# Altium PCB PCB1.PcbDoc
Units mm, origin at the board's own origin, x right, y up, seen from the top; angles counter-clockwise.
Board outline 59.82 x 77.34 mm, 2 copper layers (Top Layer, Bottom Layer); 23 components, 20 nets, 69 pads, 4 vias.
Unrouted connection lines stored in the file: 3.
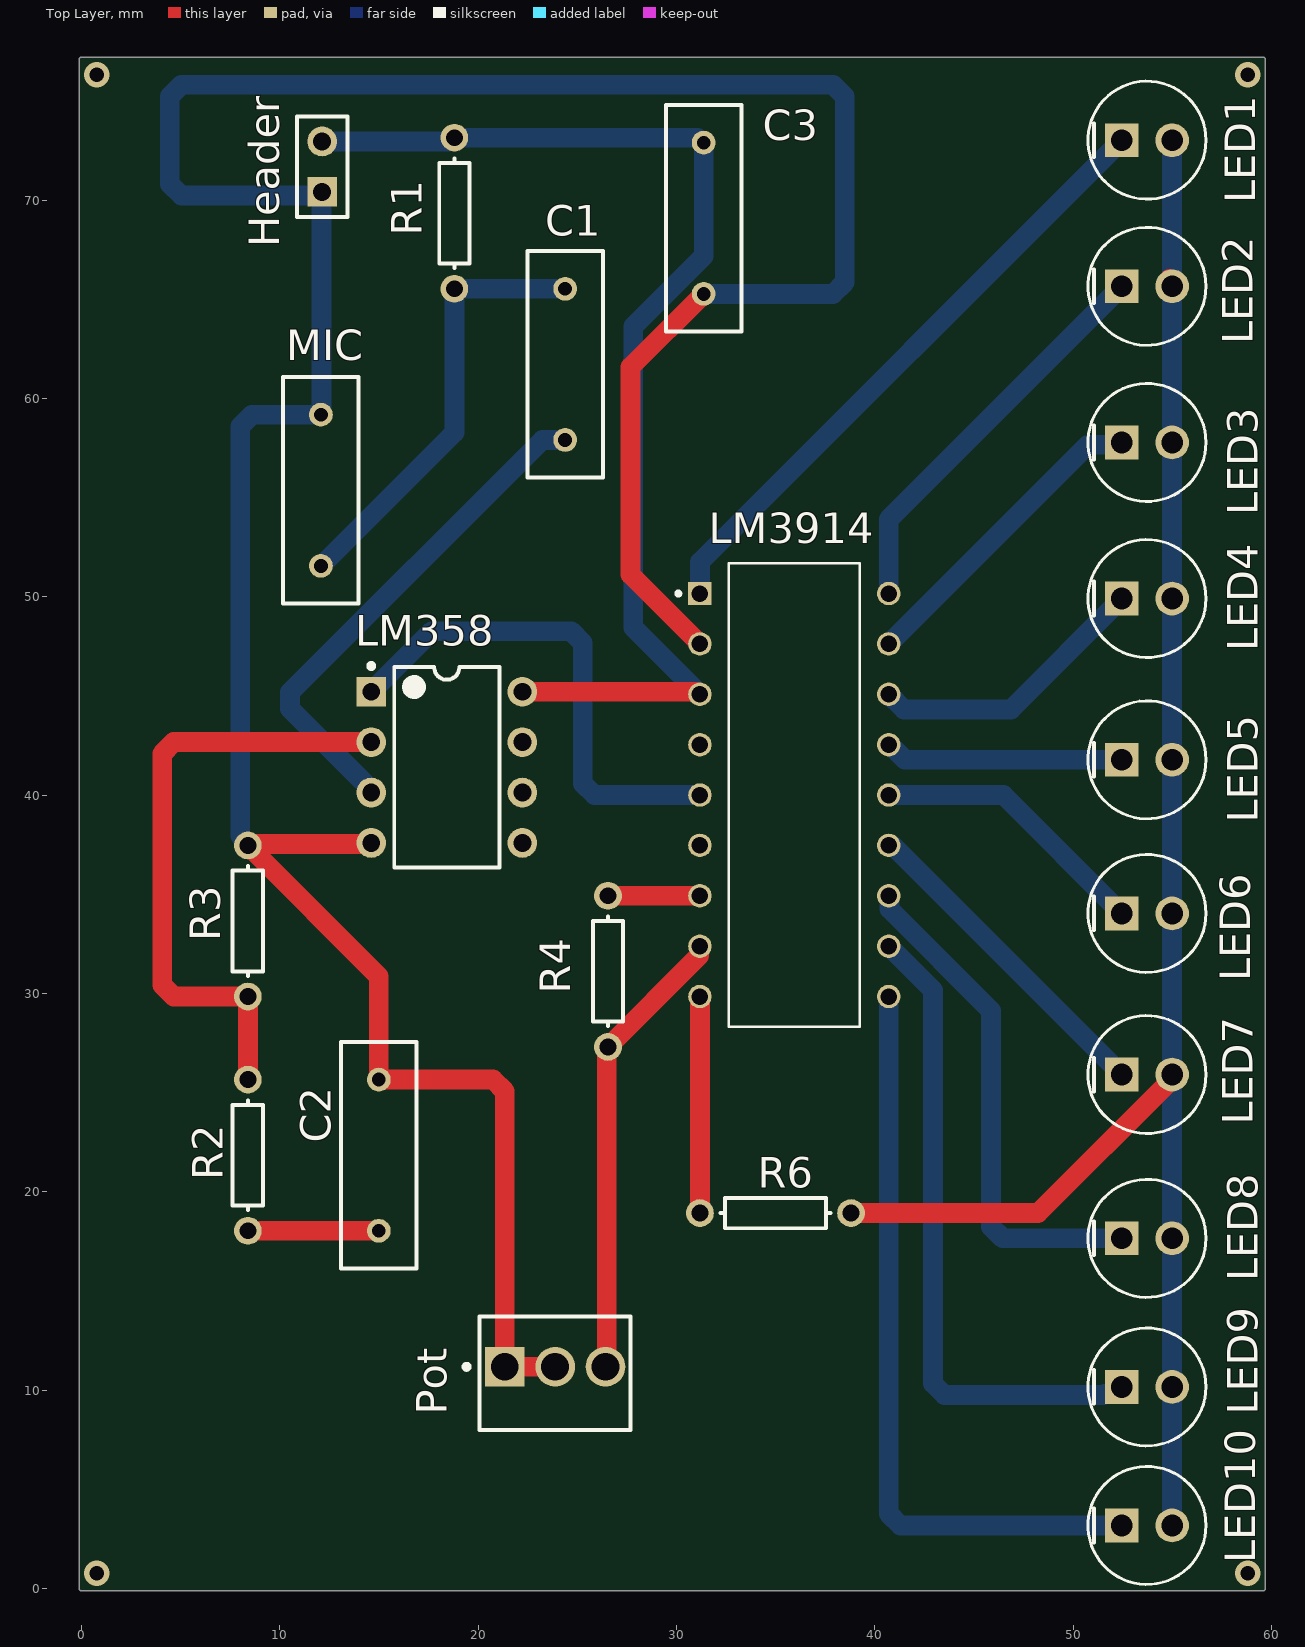
[diagram p0: Top Layer view]
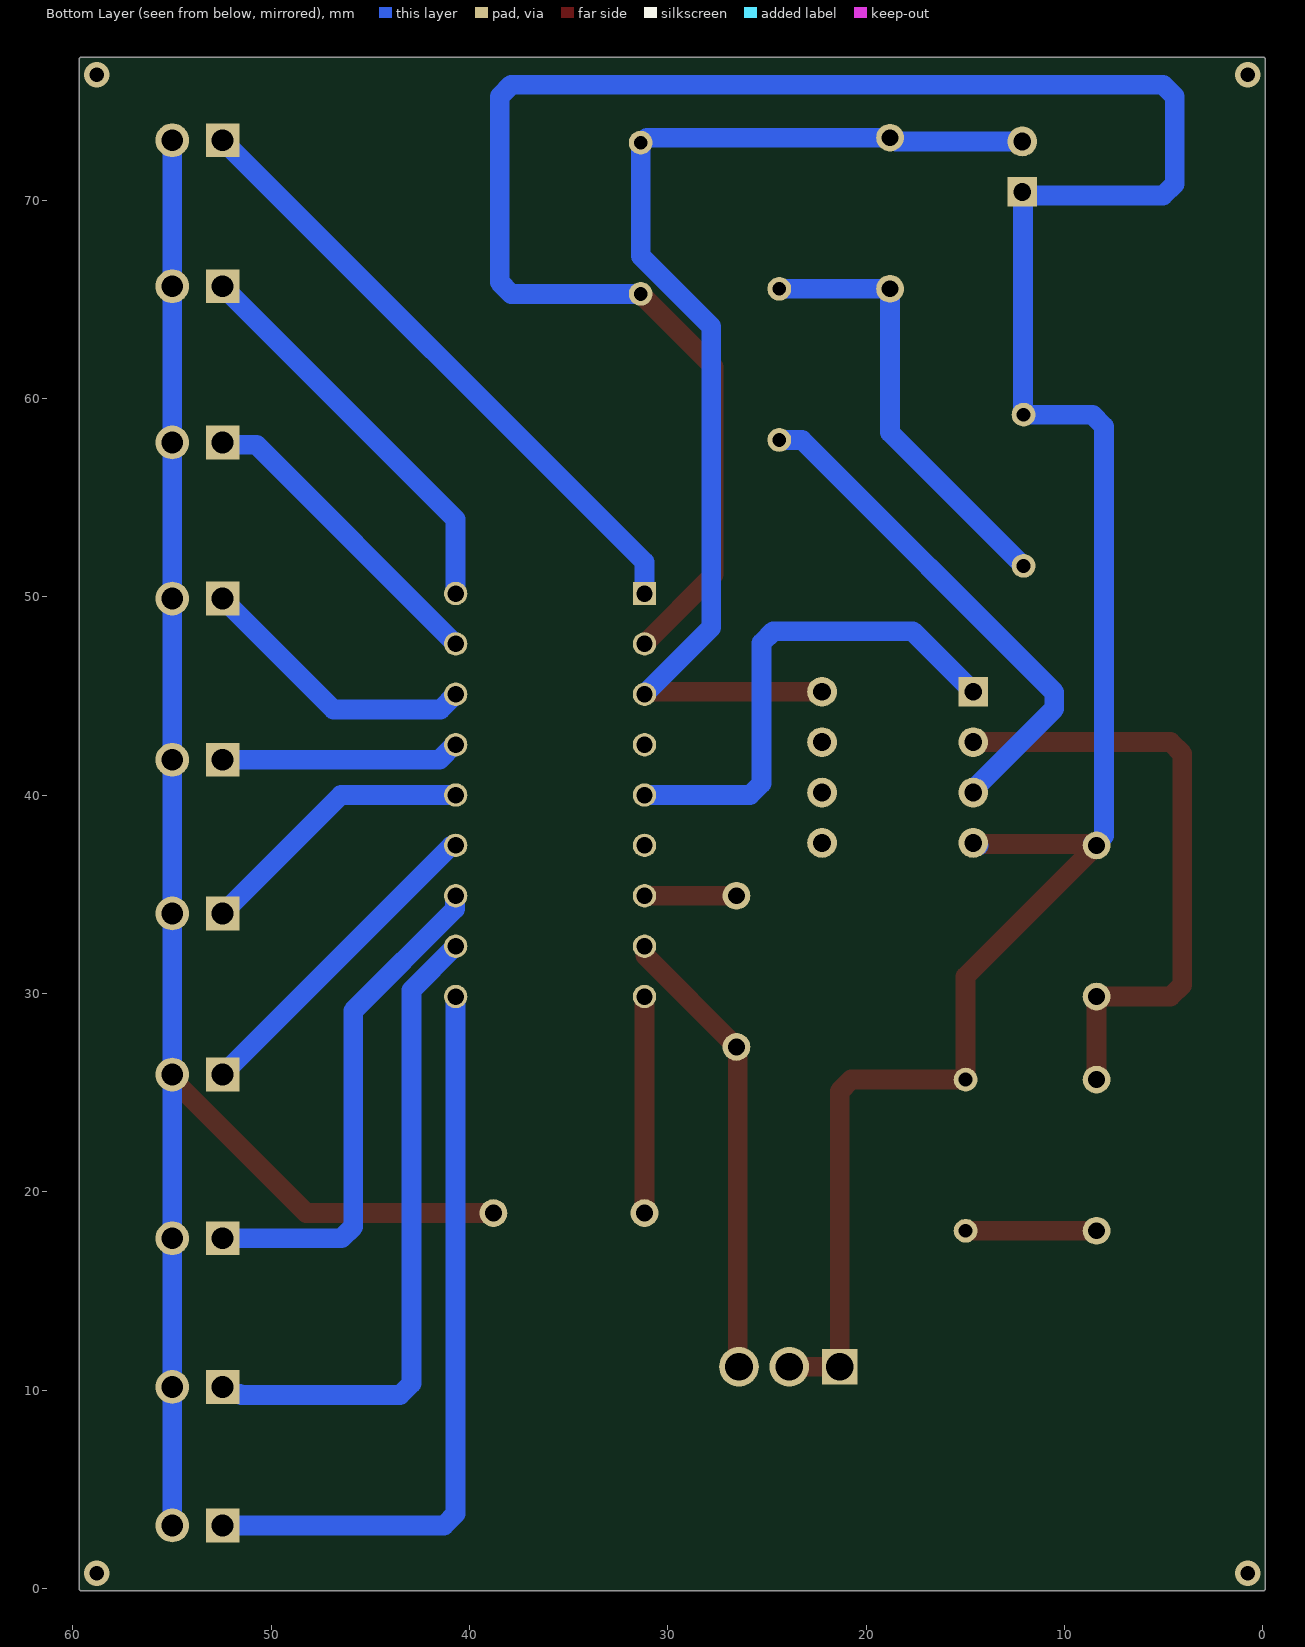
[diagram p1: Bottom Layer view, seen from below]

## Layer stack, top to bottom
Top Solder: solder mask 0.0102, Solder Resist, Dk 3.5
Top Layer: signal copper 0.0356
Dielectric 1: dielectric 0.32, FR-4, Dk 4.8
Bottom Layer: signal copper 0.0356
Bottom Solder: solder mask 0.0102, Solder Resist, Dk 3.5

## Board outline
-0.127,0 ccw(c0,0) 0,-0.127 59.563,-0.127 ccw(c59.563,0) 59.69,0 59.69,77.089 ccw(c59.563,77.089) 59.563,77.216 0,77.216 ccw(c0,77.089) -0.127,77.089

## Design rules (kind name [scope] priority, off if disabled: settings)
Clearance [All] p1: gap=0.254 ignorepadtopadclearanceinfootprint=FALSE except(0: Arc-Hole Track-Hole SMDPad-Hole THPad-Hole Via-Hole Fill-Hole Poly-Hole Region-Hole Text-Hole)
PolygonConnect [All] p1: connectstyle=Relief reliefconductorwidth=0.254 reliefentries=4 polygonreliefangle="90 Angle" airgapwidth=0.254
RoutingVias [All] p1: holewidth=0.711 width=1.27 viastyle="Through Hole" minholewidth=0.711 minwidth=1.27 maxholewidth=0.711 maxwidth=1.27
SolderMaskExpansion [All] p1: expansion=0.102 istentingtop=FALSE
Width [All] p1: maxlimit=1 minlimit=0.8 preferedwidth=1 minimp=50.000000 maximp=50.000000 favimp=50.000000
30 further rules are at their usual default settings.

## Components (designator, comment, footprint, x,y, rotation, side; value= is the part's Value field where it differs from the comment)
C1 "Cap" RAD-0.3 24.384,61.722 r90 top value=100nf
C2 "Cap" RAD-0.3 14.986,21.844 r90 top value=100nf
C3 "Cap" RAD-0.3 31.369,69.088 r90 top value=100nf
Header "Guç Kaynagı" HDR1X2 12.128,70.421 r90 top (schematic designator HHHH)
LED1 "" FP-6_544-5259_08-4-MFG 53.721,73.025 r0 top
LED2 "" FP-6_544-5259_08-4-MFG 53.721,65.659 r0 top
LED3 "" FP-6_544-5259_08-4-MFG 53.721,57.785 r0 top
LED4 "" FP-6_544-5259_08-4-MFG 53.721,49.911 r0 top
LED5 "" FP-6_544-5259_08-4-MFG 53.721,41.783 r0 top
LED6 "" FP-6_544-5259_08-4-MFG 53.721,34.036 r0 top
LED7 "" FP-6_544-5259_08-4-MFG 53.721,25.908 r0 top
LED8 "" FP-6_544-5259_08-4-MFG 53.721,17.653 r0 top
LED9 "" FP-6_544-5259_08-4-MFG 53.721,10.16 r0 top
LED10 "" FP-6_544-5259_08-4-MFG 53.721,3.175 r0 top
LM358 "" ONSC-PDIP-8-626-05_M 18.415,41.402 r0 top
LM3914 "" DIP952W45P254L2336H533Q18 35.941,40.005 r0 top
MIC "Cap" RAD-0.3 12.065,55.372 r90 top value=1UF
Pot "" TECO-640456-3 23.876,11.176 r180 top (schematic designator Pott)
R1 "Res1" AXIAL-0.3 18.796,69.342 r90 top value=10k
R2 "Res1" AXIAL-0.3 8.382,21.844 r270 top value=100k
R3 "Res1" AXIAL-0.3 8.382,33.655 r270 top value=100R
R4 "Res1" AXIAL-0.3 26.543,31.115 r270 top value=10k
R6 "Res1" AXIAL-0.3 34.989,18.923 r0 top value=1k

## Footprints (in the part's own frame and the unit in brackets; to place one, negate y for a bottom-side part, rotate by r counter-clockwise, add the part's x,y. Pads: shape width x height; smd on the part's side, far side on the other; paste and mask are expansions set on the pad)
AXIAL-0.3 [mm] "Axial Device, Thru-Hole; 2 Leads; 0.3 in Pin Spacing"
  round 1.4 hole 0.85: 1(-3.81,0) 2(3.81,0)
  silkscreen extent -2.77,-0.76 2.77,0.76
DIP952W45P254L2336H533Q18 [mm]
  rect 1.18x1.18 hole 0.83: 1(-4.763,10.16)
  round 1.18 hole 0.83: 2(-4.763,7.62) 3(-4.763,5.08) 4(-4.763,2.54) 5(-4.763,0) 6(-4.763,-2.54) 7(-4.763,-5.08) 8(-4.763,-7.62) 9(-4.763,-10.16) 10(4.763,-10.16) 11(4.763,-7.62) 12(4.763,-5.08) 13(4.763,-2.54) 14(4.763,0) 15(4.763,2.54) 16(4.763,5.08) 17(4.763,7.62) 18(4.763,10.16)
  silkscreen extent -5.95,-11.68 3.3,11.68
FP-6_544-5259_08-4-MFG [mm]
  rect 1.7x1.7 hole 1.1 paste-1000 mask+0: 1(-1.27,0)
  round 1.7 hole 1.1 paste-1000 mask+0: 2(1.27,0)
  silkscreen extent -2.97,-2.97 2.98,2.97, body extent -3.08,-3.08 3.08,3.08, height 0.25
HDR1X2 [mm] "Connector; Header; 2 Position"
  rect 1.5x1.5 hole 0.9: 1(0,0)
  round 1.5 hole 0.9: 2(2.54,0)
  silkscreen extent -1.27,-1.27 3.81,1.27
ONSC-PDIP-8-626-05_M [mm] "DIP, 8-Leads, Body 10x7.1mm, Pitch 2.54mm"
  rect 1.5x1.5 hole 0.9: 1(-3.81,3.81)
  round 1.5 hole 0.9: 2(-3.81,1.27) 3(-3.81,-1.27) 4(-3.81,-3.81) 5(3.81,-3.81) 6(3.81,-1.27) 7(3.81,1.27) 8(3.81,3.81)
  silkscreen extent -3.93,-5.05 2.65,5.23, body extent -3.95,-5 3.95,5, height 5.33
RAD-0.3 [mm] "Radial Cap, Thru-Hole; 2 Leads; 0.3 in Pin Spacing"
  round 1.2 hole 0.7: 1(-3.81,0) 2(3.81,0)
  silkscreen extent -5.71,-1.91 5.71,1.91
TECO-640456-3 [mm] "Through Hole, 3-Leads, Body 7.62x5.72mm, Pitch 2.54mm"
  rect 2x2 / inner rect 1.8x1.8 / far side rect 1.8x1.8 hole 1.4 paste+0: 1(2.54,0)
  round 2 hole 1.4 paste+0: 2(0,0) 3(-2.54,0)
  silkscreen extent -3.81,-2.54 4.59,3.18, body extent -3.81,-2.54 3.81,3.18, height 10.03

## Part data
C1 C2 C3 MIC: "Capacitor", LatestRevisionDate=17-Jul-2002, LatestRevisionNote="Re-released for DXP Platform.", PackageDescription="Radial Cap, Thru-Hole; 2 Leads; 0.3 in Pin Spacing", PackageReference=RAD-0.3, Published=8-Jun-2000, Publisher="Altium Limited"
Header: library part "Header 2", "Header, 2-Pin", LatestRevisionDate=17-Jul-2002, LatestRevisionNote="Re-released for DXP Platform.", Publisher="Altium Limited"
LED1 LED2 LED3 LED4 LED5 LED6 LED7 LED8 LED9 LED10: library part CMP-02520-000005-1, "EMITTER IR 940NM 100MA RADIAL", Ambient Temperature Range High=+85°C, Ambient Temperature Range Low=-40°C, Colour=Infrared, Forward Current=100mA, Forward Voltage=1.35V, Manufacturer=Vishay, Manufacturer Part Number=TSAL6100, Max Junction Temp=+100°C, Package=6.544-5259.08-4, Power Dissipation=160mW, Reverse Voltage=5V, Temperature="-40°C to +85°C", Automotive=No, Category=Diode, ComponentLink2Description=Datasheet, ComponentLink2URL=http://www.vishay.com/docs/81009/tsal6100.pdf, Device Class L1=Optoelectronics, Device Class L2=LEDs, Device Class L3=unset, Digikey Description="EMITTER IR 940NM 100MA RADIAL", Lead Free=Yes, Led Orientation=Straight, Mouser Description="TSAL6100 Series 950 nm 100 mA Through Hole Infrared Emitting Diode - T-1 3/4", Octopart=https://octopart.com/tsal6100-vishay-39643276, Peak Emmision Wavelength=940nm, RoHS=TRUE, Temperature Range High=+85°C, Temperature Range Low=-40°C, Viewing Angle=20°, Ipc Land Pattern Name=DIORD254W110D580H900
LM358: library part CMP-1310-00098-1, "Single Supply Dual Operational Amplifier, 3 to 32 V, 0 to 70 degC, 8-Pin PDIP, Tube", Manufacturer="On Semiconductor", PartNumber=LM358N, ComponentLink1Description="Manufacturer URL", ComponentLink1URL=http://www.onsemi.com/, ComponentLink2Description=Datasheet, ComponentLink2URL=http://www.onsemi.cn/pub_link/Collateral/LM358-D.PDF, ComponentLink3Description="Package Specification", ComponentLink3URL=http://www.onsemi.com/pub_link/Collateral/LM211-D.PDF, DatasheetVersion="Rev. 27", Mounting Technology="Through Hole", PackageDescription="8-Pin Plastic Dual-In Line Package, Body 9.52 x 6.605 mm, Pitch 2.54 mm", PackageReference=PDIP-8-626-05, PackageVersion="Rev. M, 04/2010", Packing=Tube, RoHS=FALSE, VCC Max (V)=32, VCC Min (V)=3
LM3914: library part LM3914N-1/NOPB, "None <a href=\"https://snapeda.com/parts/LM3914N-1/NOPB/Texas%20Instruments/view-part/?ref=eda\">Check prices</a>", Package=None, Availability=Unavailable, MP=LM3914N-1/NOPB, Price=None
Pot: library part CMP-2000-05418-1, "Male Header, Pitch 2.54 mm, 1 x 3 Position, Height 10.03 mm, Tail Length 3.56 mm, -55 to 105 degC", Color=White, Current, Rating="5 /  / A", Flammability Rating=UL94V-0, Manufacturer="TE Connectivity", Temperature, Operating="-55to+105 /  / degC", Voltage, Rating="250 /  / V", Agency Approvals=CSA,UL, Angle=Straight, Brand/Series=MTA-100Series, Color, Housing=White, Connector Type=MTA-100, Contact Centerline Spacing="0.100 /  / in.", Contact Mating Area Plating=Tin, Contact Plating=Tin, Contact Shape=Square, Contact Termination Area Plating=Tin, Datasheet URL=https://datasheet.ciiva.com/16456/eng-ds-82056-mta-0608-16456886.pdf, Datasheet Version=Jun-08, Length, Overall="0.3 /  / \"", Length, Pin="0.14 /  / \"", Length, Terminal Post="0.14 /  / in.", Manufacturer URL=http://www.te.com/, Material, Contact=CopperAlloy, Material, Housing=Polyester, Mount Angle=Vertical, Mounting Hole Size="0.04 /  / \"", Mounting Type=PCMount, Number of Contacts=3, Number of Positions=3, Number of Rows=1, Pin Spacing="0.1 /  / \"", Primary Type=InterconnectSystem, Size, Post="0.025 /  / in.", Special Features=Pinstrip, Standards=RoHSCompliant,ELVCompliant,UL94V-0, Termination=Solder, Type=PCBPlug
R1 R2 R3 R4 R6: "Resistor", LatestRevisionDate=17-Jul-2002, LatestRevisionNote="Re-released for DXP Platform.", PackageDescription="Axial Device, Thru-Hole; 2 Leads; 0.3 in Pin Spacing", PackageReference=AXIAL-0.3, Published=8-Jun-2000, Publisher="Altium Limited"

## Via types
v1: diameter 1.27, hole 0.711, Top Layer to Bottom Layer, 4 vias

## Nets (pads, with @x,y where several pads share a name; then routed paths per layer and width w, separated by ;. In a path a pad name is that pad's centre, name@x,y a point inside that pad or via, vN(x,y) a via of type N, cw(c..) or ccw(c..) an arc to the next point about the centre after c; other vN are vias at no path point)
NetC1_1: C1.1 LM358.3 | length 25.9
  Bottom Layer w1: LM358.3 14.605,40.267 10.515,44.357 10.515,45.186 23.241,57.912 C1.1
NetC1_2: C1.2 MIC.1 R1.1 | length 22.3
  Bottom Layer w1: MIC.1 18.796,58.293 R1.1 C1.2
NetC2_1: C2.1 R2.2 | length 6.6
  Top Layer w1: R2.2 C2.1
NetC2_2: C2.2 C3.1 Header.1 LM358.4 LM3914.2 LM3914.4 MIC.2 Pot.1 Pot.2 R3.1 | length 165.7
  Top Layer w1: LM358.4 14.541,37.529 8.445,37.529 R3.1 14.986,30.861 C2.2 20.75,25.654 21.336,25.068 Pot.1 Pot.2 ; LM3914.2 27.686,51.117 27.686,61.595 C3.1
  Bottom Layer w1: R3.1 R3.1@8.445,37.529 ; R3.1@8.567,37.542 8.197,37.542 8.305,37.65 8.001,37.954 8.001,58.596 8.587,59.182 MIC.2 ; MIC.2@12.097,59.214 Header.1@12.097,70.39 ; Header.1 Header.1@12.097,70.39 ; LM358.4@14.343,37.465 14.47,37.592 LM358.4 ; LM3914.2 LM3914.2@31.178,47.674 ; C3.1 37.895,65.278 38.481,65.864 38.481,75.233 37.895,75.819 5.031,75.819 4.445,75.233 4.445,70.817 5.031,70.231 11.938,70.231 Header.1@12.097,70.39
NetC3_2: C3.2 Header.2 LM358.8 LM3914.3 LM3914.9 R1.2 R6.1 | length 70.3
  Top Layer w1: Header.2 Header.2@12.192,73.025 ; R1.2@18.732,73.088 R1.2 ; LM358.8 31.003,45.212 31.13,45.085 LM3914.3 ; R6.1 LM3914.9
  Bottom Layer w1: Header.2@12.192,73.025 Header.2 18.497,72.962 18.688,73.152 R1.2 31.061,73.152 31.315,72.898 C3.2 31.369,67.193 27.813,63.637 27.813,48.45 LM3914.3
NetLED1_1: LED1.1 LM3914.1 | length 31.7
  Bottom Layer w1: LM3914.1 31.178,51.752 LED1.1
NetLED1_2: LED1.2 LED2.2 LED3.2 LED4.2 LED5.2 LED6.2 LED7.2 LED8.2 LED9.2 LED10.2 R6.2 | length 90.4
  Top Layer w1: R6.2 48.232,18.923 54.857,25.548 54.857,25.774 LED7.2 ; LED2.2@54.857,66.019 54.857,65.793 LED2.2 ; LED5.2@54.927,41.846 LED5.2 ; LED3.2@54.927,57.721 LED3.2 LED3.2@55.054,57.848 ; LED6.2@54.991,34.225 LED6.2 LED6.2@55.054,33.972 ; LED4.2@55.054,49.847 LED4.2 LED4.2@55.054,49.974
  Bottom Layer w1: LED10.2@54.991,2.986 LED10.2 LED9.2 LED8.2 LED7.2 LED6.2 LED5.2 LED4.2 LED3.2 LED2.2 LED1.2
NetLED2_1: LED2.1 LM3914.18 | length 20.4
  Bottom Layer w1: LM3914.18 40.703,53.911 LED2.1
NetLED3_1: LED3.1 LM3914.17 | length 16
  Bottom Layer w1: LM3914.17 50.747,57.668 52.334,57.668 LED3.1
NetLED4_1: LED4.1 LM3914.16 | length 14.4
  Bottom Layer w1: LM3914.16 41.465,44.323 46.863,44.323 LED4.1
NetLED5_1: LED5.1 LM3914.15 | length 12.1
  Bottom Layer w1: LM3914.15 40.752,42.545 41.514,41.783 LED5.1
NetLED6_1: LED6.1 LM3914.14 | length 14.2
  Bottom Layer w1: LM3914.14 46.482,40.005 LED6.1
NetLED7_1: LED7.1 LM3914.13 | length 16.5
  Bottom Layer w1: LM3914.13 40.738,37.431 40.928,37.431 LED7.1
NetLED8_1: LED8.1 LM3914.12 | length 25.7
  Bottom Layer w1: LM3914.12 40.738,34.891 40.738,34.251 45.864,29.125 45.864,18.239 46.45,17.653 LED8.1
NetLED9_1: LED9.1 LM3914.11 | length 32.9
  Bottom Layer w1: LM3914.11 42.926,30.162 42.926,10.336 43.512,9.75 51.515,9.75 51.575,9.81 52.101,9.81 LED9.1
NetLED10_1: LED10.1 LM3914.10 | length 38.1
  Bottom Layer w1: LM3914.10 40.703,3.761 41.289,3.175 LED10.1
NetLM358_1: LM358.1 LM3914.5 | length 25.4
  Bottom Layer w1: LM358.1 14.855,45.462 17.653,48.26 24.687,48.26 25.273,47.674 25.273,40.591 25.859,40.005 LM3914.5
NetLM358_2: LM358.2 R2.1 R3.2 | length 31.2
  Top Layer w1: R2.1 R3.2 4.65,29.845 4.064,30.431 4.064,42.086 4.65,42.672 LM358.2
NetLM3914_6: LM3914.6 LM3914.7 R4.1 | length 4.6
  Top Layer w1: R4.1 LM3914.7
NetLM3914_8: LM3914.8 Pot.3 R4.2 | length 23.2
  Top Layer w1: Pot.3 26.479,11.239 26.479,27.241 R4.2 31.144,31.906 31.144,32.351 LM3914.8
pads on no net: LM358.5 LM358.6 LM358.7
copper on no net:
  other v1: 0.762,0.762 58.801,0.762 0.762,76.327 58.801,76.327